# EAGLE board Bluetooth Controlled Car (EAGLE 9.7.0)

Size 210.42 x 140.76 mm. Coordinates in mm from the lower left corner, seen from the top.
Outline: 0,0 210.42,0 210.42,140.76 0,140.76 0,0
Copper layers (1*16): Top 0.035mm / dielectric 1.5mm / Bottom 0.035mm
Design rules "default": minimum track width 6mil, minimum drill 0.35mm, track to track 6mil, track to pad 6mil, pad to pad 6mil, via to via 6mil, smd to smd 6mil, copper to edge 40mil, drill to drill 6mil, minimum pad ring 10mil, minimum via ring 8mil, stop-mask expansion 4mil, vias tented up to drill 0mil, thermal gap 10mil

## Footprints (pad centres in the part's own frame; a part is rotated, then mirrored left to right if it is on the bottom)
BATTERY-GENERIC = drill 1.118 pad 3.15 octagon: + 2.54,0; - -2.54,0
DG01D = drill 1.118 pad 3.15 octagon: + 2.54,0; - -2.54,0
RESAD1016W63L850D250B = drill 0.83 pad 1.43: 1 -5.08,0; 2 5.08,0
GL5528 = drill 0.8 pad 1.4: 1 -1.702,0; 2 1.702,0
HA-06-SM065 = drill 1 pad 1.676: 1 -2.54,-2.54; 2 0,2.54; 3 2.54,-2.54
TSOP48 = drill 0.8: 1 -2.54,0; 2 0,0; 3 2.54,0
JHD-162A = drill 1.016 long: 1 -19.05,0; 2 -16.51,0; 3 -13.97,0; 4 -11.43,0; 5 -8.89,0; 6 -6.35,0; 7 -3.81,0; 8 -1.27,0; 9 1.27,0; 10 3.81,0; 11 6.35,0; 12 8.89,0; 13 11.43,0; 14 13.97,0; 15 16.51,0; 16 19.05,0
ARDUINO-UNO-R3-SHIELD = drill 1.016 pad 1.88: 3.3V 24.13,-2.54; 5V 24.13,0; A0 24.13,12.7; A1 24.13,15.24; A2 24.13,17.78; A3 24.13,20.32; A4 24.13,22.86; A5 24.13,25.4; AREF -24.13,-13.97; D2 -24.13,20.32; D3 -24.13,17.78; D4 -24.13,15.24; D5 -24.13,12.7; D6 -24.13,10.16; D7 -24.13,7.62; D8 -24.13,3.81; D9 -24.13,1.27; D10 -24.13,-1.27; D11 -24.13,-3.81; D12 -24.13,-6.35; D13 -24.13,-8.89; GND@0 24.13,2.54; GND@1 24.13,5.08; GND@2 -24.13,-11.43; IOREF 24.13,-7.62; NC 24.13,-10.16; RES 24.13,-5.08; RX -24.13,25.4; SCL -24.13,-19.05; SDA -24.13,-16.51; TX -24.13,22.86; VIN 24.13,7.62
DIP762W53P254L1969H508Q16B = drill 0.743 pad 1.343: 1 -3.81,8.89; 2 -3.81,6.35; 3 -3.81,3.81; 4 -3.81,1.27; 5 -3.81,-1.27; 6 -3.81,-3.81; 7 -3.81,-6.35; 8 -3.81,-8.89; 9 3.81,-8.89; 10 3.81,-6.35; 11 3.81,-3.81; 12 3.81,-1.27; 13 3.81,1.27; 14 3.81,3.81; 15 3.81,6.35; 16 3.81,8.89

## Placement (x,y rotation side)
BAT1  9V  [BATTERY-GENERIC]  202.16,70.68 180 top
M1  MOTOR_DG01D  [DG01D]  168.13,128.06 270 top
M2  MOTOR_DG01D  [DG01D]  134.54,36.82 90 top
R1  250  [RESAD1016W63L850D250B]  110.89,52.83 90 top
R2  250  [RESAD1016W63L850D250B]  90.63,79.68 90 top
R3  PHOTOCELL_GL5528  [GL5528]  119.42,45.53 180 top
R4  1k  [RESAD1016W63L850D250B]  95.06,52.06 180 top
RPOT1  125  [HA-06-SM065]  88.09,84.76 0 top
U1  IR-RECEIVERTSOP48  [TSOP48]  103.06,131.77 0 top
U2  LCD-16X2JHD-162A  [JHD-162A]  54.19,36.63 0 top
U3  ARDUINO-UNO-R3-SHIELD  [ARDUINO-UNO-R3-SHIELD]  47.88,87.74 270 top
U4  L293E  [DIP762W53P254L1969H508Q16B]  137.48,87.54 90 top

## Library data of the parts
BAT1 M1 M2 R1-R4 RPOT1 U1-U4 = Tinkercad

## Nets
BAT1+: BAT1.+ U4.1 U4.8 U4.9 U4.16
BAT1-: BAT1.- U4.4 U4.5 U4.12 U4.13
M1_+: M1.+ U4.11
M1_-: M1.- U4.14
M2_+: M2.+ U4.3
M2_-: M2.- U4.6
R2_2: R2.2 RPOT1.3
U2_LED+: R1.1 U2.15
U2_VO: RPOT1.2 U2.3
U3_5V: R1.2 R2.1 R3.1 U1.3 U2.2 U3.5V
U3_A0: U2.11 U3.A0
U3_A1: U2.12 U3.A1
U3_A2: U2.13 U3.A2
U3_A3: U2.14 U3.A3
U3_A4: R3.2 R4.2 U3.A4
U3_D2: U3.D2 U4.2
U3_D3: U3.D3 U4.7
U3_D4: U3.D4 U4.15
U3_D5: U3.D5 U4.10
U3_D10: U1.1 U3.D10
U3_D11: U2.6 U3.D11
U3_D12: U2.4 U3.D12
U3_GND: R4.1 RPOT1.1 U1.2 U2.1 U2.5 U2.16 U3.GND@0 U3.GND@1 U3.GND@2

## Tracks (layer width: path | path; a pad name or v marks a point on that pad's centre or on a via)
BAT1+  (4 unrouted)
BAT1-  (4 unrouted)
M1_+  (1 unrouted)
M1_-  (1 unrouted)
M2_+  (1 unrouted)
M2_-  (1 unrouted)
R2_2  (1 unrouted)
U2_LED+  (1 unrouted)
U2_VO  (1 unrouted)
U3_5V  (5 unrouted)
U3_A0  (1 unrouted)
U3_A1  (1 unrouted)
U3_A2  (1 unrouted)
U3_A3  (1 unrouted)
U3_A4  (2 unrouted)
U3_D2  (1 unrouted)
U3_D3  (1 unrouted)
U3_D4  (1 unrouted)
U3_D5  (1 unrouted)
U3_D10  (1 unrouted)
U3_D11  (1 unrouted)
U3_D12  (1 unrouted)
U3_GND  (8 unrouted)